# Altium PCB ExtendBoard.PcbDoc
Units mil, origin at the board's own origin, x right, y up, seen from the top; angles counter-clockwise.
Board outline 1157 x 1033 mil, 2 copper layers (Top1, Bottom4), stack 42.17 mil thick; 6 components, 10 nets, 32 pads, 5 vias.
Unrouted connection lines stored in the file: 56.
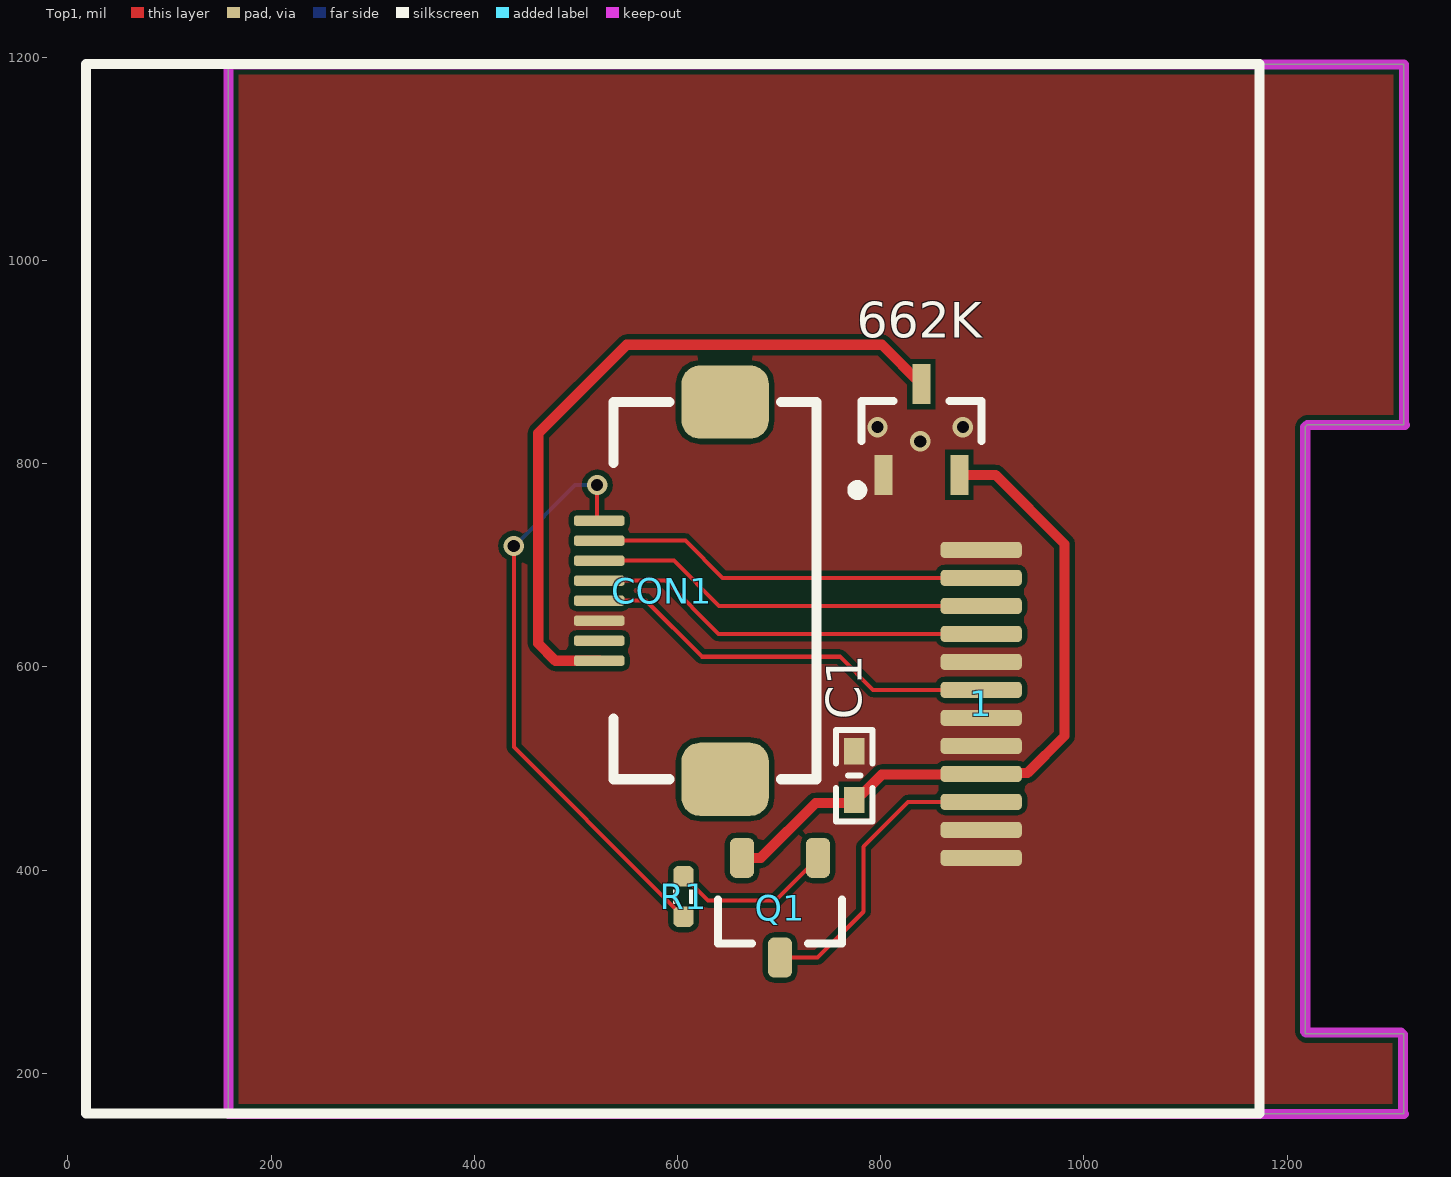
[diagram p0: Top1 view]
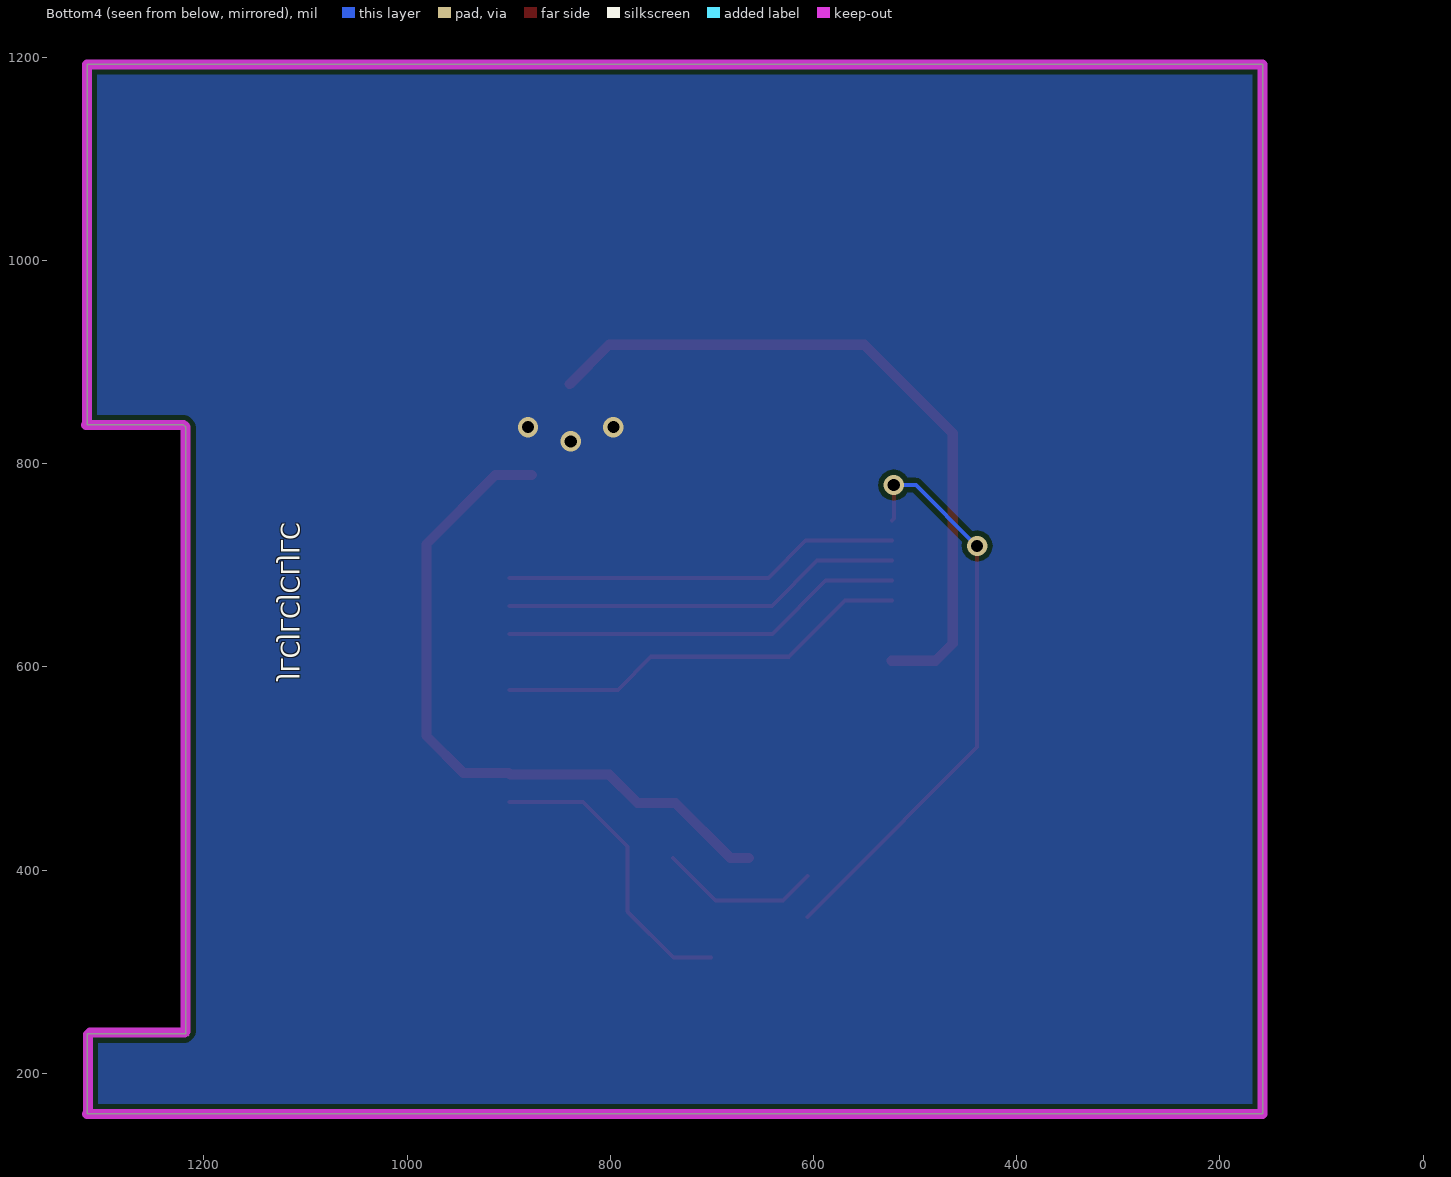
[diagram p1: Bottom4 view, seen from below]
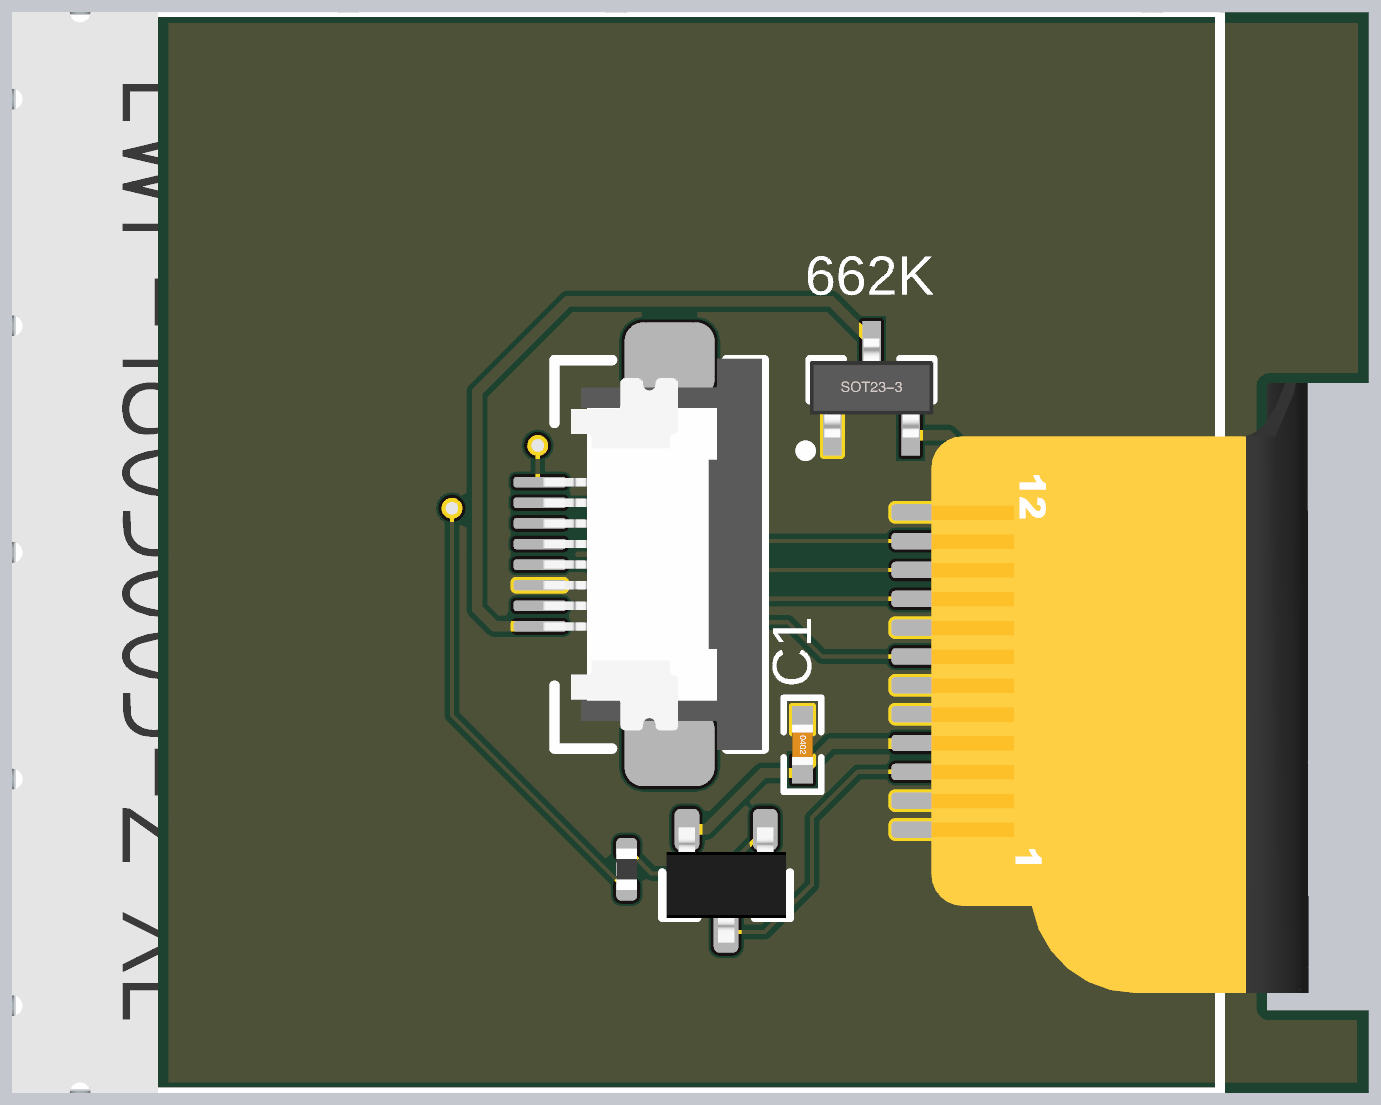
[diagram p2: 3D render of the assembled board from above, using the file's embedded part models]

## Layer stack, top to bottom
Top Solder: solder mask 0.4, Solder Resist, Dk 3.5
Top1: signal copper 1.4
Dielectric 2: core 39.37, PP-006, Dk 4.2
Bottom4: signal copper 1.4
Bottom Solder: solder mask 0.4, Solder Resist, Dk 3.5

## Board outline
158,160 158,1193 1315,1193 1315,839 1315,838.49 1220.49,838.49 1218,836 1218,239 1315,239 1315,160

## Design rules (kind name [scope] priority, off if disabled: settings)
Clearance [All] p1: gap=5 ignorepadtopadclearanceinfootprint=FALSE
ComponentClearance [All] p1: gap=0 collisioncheckmode=3 verticalgap=0 showdistances=FALSE
DiffPairsRouting [All] p1: maxlimit=9 minlimit=9 mostfreqgap=9 toplayer_minwidth=4 toplayer_maxwidth=4 toplayer_prefwidth=4 bottomlayer_minwidth=4 bottomlayer_maxwidth=4 bottomlayer_prefwidth=4 maxuncoupledlength=500
FanoutControl Fanout_BGA [All] p1: bgadir=Out bgaviamode=Centered fanoutstyle=Auto fanoutdirection=Alternating viagrid=1 // Fanout_BGA (Default Rule)
HoleSize [All] p1: absolutevalues=TRUE maxlimit=10000 minlimit=8 maxpercent=80.000 minpercent=20.000
MinimumSolderMaskSliver [All] p1 off: minsoldermaskwidth=2
PlaneClearance [All] p1: clearance=8
PlaneConnect [All] p1: planeconnectstyle=Direct reliefexpansion=20 reliefentries=4 reliefconductorwidth=10 reliefairgap=10
PolygonConnect [All] p1: connectstyle=Direct reliefconductorwidth=10 reliefentries=4 polygonreliefangle="90 Angle" airgapwidth=10
RoutingVias [All] p1: holewidth=8 width=16 viastyle="Through Hole" minholewidth=6 minwidth=12 maxholewidth=28 maxwidth=50
SilkToBoardRegionClearance [All] p1 off:
SilkToSilkClearance [All] p1: silktosilkclearance=0
SilkToSolderMaskClearance [IsPad] p1: minsilkscreentomaskgap=0 clearancetoexposedcopper=TRUE
SolderMaskExpansion [All] p1: expansion=3 istentingtop=FALSE
Width [All] p1: maxlimit=10000 minlimit=4 preferedwidth=4
20 further rules are at their usual default settings.

## Classes and differential pairs
component class Main: 1

## Components (designator, comment, footprint, x,y, rotation, side; value= is the part's Value field where it differs from the comment)
1 "LCD-240x240" LCD-240X240-NOHOLE 692,694 r270 bottom
662K "XC6206P332MR" SOT23-3L 840,834 r0 top (schematic designator V1)
C1 "104" "C 0402_M" 774,493 r270 top
CON1 "FFC_0.5_8" FFC_0.5_8 612,675 r90 top
Q1 "AO3415A" SOT23-3 701,363 r270 top
R1 "1K" RES_0402 606,374 r90 top value=22R

## Footprints (in the part's own frame and the unit in brackets; to place one, negate y for a bottom-side part, rotate by r counter-clockwise, add the part's x,y. Pads: shape width x height; smd on the part's side, far side on the other; paste and mask are expansions set on the pad)
"C 0402_M" [mil] "无极性贴片电容"
  rect 26x20 smd: 1(-24,0) 2(24,0)
  silkscreen extent -45,-18 45,18, body extent -20,-10 20,10, height 21
FFC_0.5_8 [mil]
  rrect50% 72x86 smd: 0(-185.63,-35) 0(185.63,-35)
  rrect50% 10x50 smd: 1(-68.9,89) 2(-49.21,89) 3(-29.53,89) 4(-9.84,89) 5(9.84,89) 6(29.53,89) 7(49.21,89) 8(68.9,89)
  silkscreen extent -186,-125 186,75, body extent -187,-124 187,87, height 82
LCD-240X240-NOHOLE [mil]
  rrect50% 15.75x80 smd far side: 1(282,-207) 2(254.44,-207) 3(226.88,-207) 4(199.32,-207) 5(171.76,-207) 6(144.2,-207) 7(116.65,-207) 8(89.09,-207) 9(61.53,-207) 10(33.97,-207) 11(6.41,-207) 12(-21.15,-207)
  body extent -499,-565 534,673, height 20
RES_0402 [mil]
  rrect50% 20x20 smd: 1(-20,0) 2(20,0)
  silkscreen extent -7,-10 7,10, body extent -20,-10 20,10, height 14
SOT23-3 [mm] "SOT23, 3-Leads, Body 3.1x3.0mm (max), Pitch 0.95mm, IPC Medium Density"
  rrect50% 1x0.6 smd: 1(-1.246,0.95) 2(-1.246,-0.95) 3(1.246,0)
  silkscreen extent -0.2,-1.55 0.9,1.55, body extent -1.3,-1.45 1.5,1.45, height 1.2
SOT23-3L [mm] "3x1.3x1mm(长宽高)"
  rect 0.45x1 smd: 1(-0.95,-1.143) 2(0.95,-1.143) 3(0,1.125)
  silkscreen extent -1.72,-1.65 1.5,0.7, body extent -1.5,-1.2 1.5,1.2, height 1.05

## Part data
1: "显示屏"
662K: "低压差线性稳压芯片", BOM名称=低压差线性稳压芯片
C1: library part C, "无极性贴片电容", BOM名称=无极性贴片电容, 材质=X7R
CON1: "FFC", System=Connector
Q1: "MOSFET", LatestRevisionDate=17-Jul-2002, LatestRevisionNote="Re-released for DXP Platform.", PackageDescription="TO, Flat Index; 3 In-Line, Axial Leads; Body Dia. 4.6mm; Lead Dia. 0.5 mm (max)", PackageReference=E3, PackageVersion=1995/1996, Published=8-Jun-2000, Publisher="Altium Limited"
R1: library part 电阻-0402, "Resistor"

## Via types
v1: diameter 20, hole 12, Top1 to Bottom4, 5 vias

## Nets (pads, with @x,y where several pads share a name; then routed paths per layer and width w, separated by ;. In a path a pad name is that pad's centre, name@x,y a point inside that pad or via, vN(x,y) a via of type N, cw(c..) or ccw(c..) an arc to the next point about the centre after c; other vN are vias at no path point)
3V3: 1.4 662K.2 C1.2 Q1.2 | length 685
  Top1 w10: Q1.2 682.06,412.06 736,466 C1.2@773,466 ; C1.2@775,468 801,494 898.32,494 900.05,495.73 944.73,495.73 981,532 981,721 913,789 662K.2
DC: 1.7 CON1.4 | length 412.4
  Top1 w4: CON1.4 568.84,665.16 624,610 760,610 792.65,577.35 1.7
GND: 1.1 1.2 1.5 1.6 1.8 1.12 662K.1 C1.1 CON1.3
  other v1: 839,822 797,836 881,836
LCD_BL: 
LCD_BL_VCC: 1.3 Q1.3 | length 298.9
  Top1 w4: Q1.3 737.94,313.94 783,359 783,423 827.12,467.12 1.3
MOSI: 1.10 CON1.6 | length 394.4
  Top1 w4: CON1.6 596.47,704.53 640.97,660.03 1.10
NetQ1_1: 
RES: 1.11 CON1.7 | length 391.2
  Top1 w4: CON1.7 607.79,724.21 644.41,687.59 1.11
SCK: 1.9 CON1.5 | length 397.7
  Top1 w4: CON1.5 588.16,684.84 640.53,632.47 1.9
VDD_5V: 
pads on no net: 662K.3 CON1.0 CON1.1 CON1.2 CON1.8 Q1.1 R1.1 R1.2
copper on no net: | length 1439.6
  Top1 w4: v1@439,718.7 439,521 583,377 606,354 ; v1(521,779) 521,745.9 523,743.9 ; 606,394 630,370 696.35,370 738.4,412.06
  Top1 w10: 523,606.1 479.9,606.1 463,623 463,830 550,917 801.29,917 840,878.29
  Bottom4 w4: v1@439,718.7 499.3,779 v1(521,779)
  other v1: 439,719

## Polygon pours and split planes (outlines as drawn)
GND on Bottom4 "GND_L02_P012" (solid, remove dead copper, pour order 12): -41,1233 -41,140 -43,138 -32,127 1439,127 1439,1218 1417,1240
GND on Bottom4 "GND_L02_P000" (solid, remove dead copper, pour order 0): -70,1353
GND on Top1 "GND_L01_P011" (solid, remove dead copper, pour order 11): -26,1230 -25,1229 -25,115 1401,115 1387,129 1387,1249

## Keep-outs
Keep-Out Layer:
  lines w10: 158,160 1315,160 ; 158,160 158,1193 ; 158,160 158,1193 ; 158,160 1315,160 ; 158,1193 1315,1193 ; 158,1193 1315,1193 ; 1315,160 1314,161 1314,238 1312,240 1219,240 1218,241 1218,836 1220,838 1316,838 1315,839 1315,1193

## Silkscreen, mask and mechanical layers (free items; w line width, h text height)
Bottom Overlay:
  text "JLCJLCJCLJLC" at 1130.4,586.76 h31.5 r90
Mechanical 1:
  lines w10: 1218,238 1218,836 1220.49,838.49 1315,838.49 ; 1218,239 1315,239 1315,160 158,160 158,1193 1315,1193 1315,839